# Altium PCB PCB1.PcbDoc
Units mm, origin at the board's own origin, x right, y up, seen from the top; angles counter-clockwise.
Board outline 130 x 70 mm, 2 copper layers (Top Layer, Bottom Layer); 76 components, 56 nets, 268 pads, 0 vias.
Unrouted connection lines stored in the file: 181.
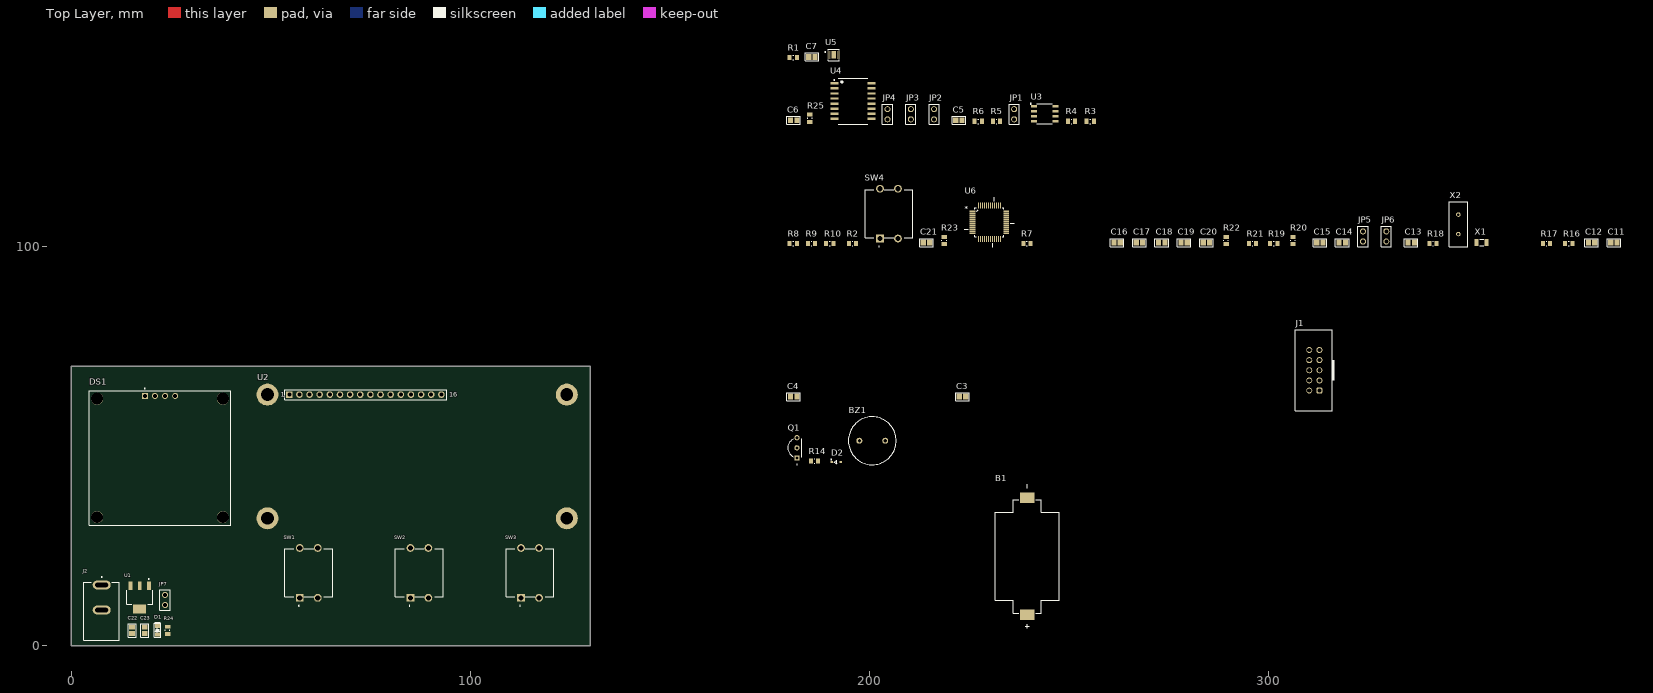
[diagram p0: Top Layer view]
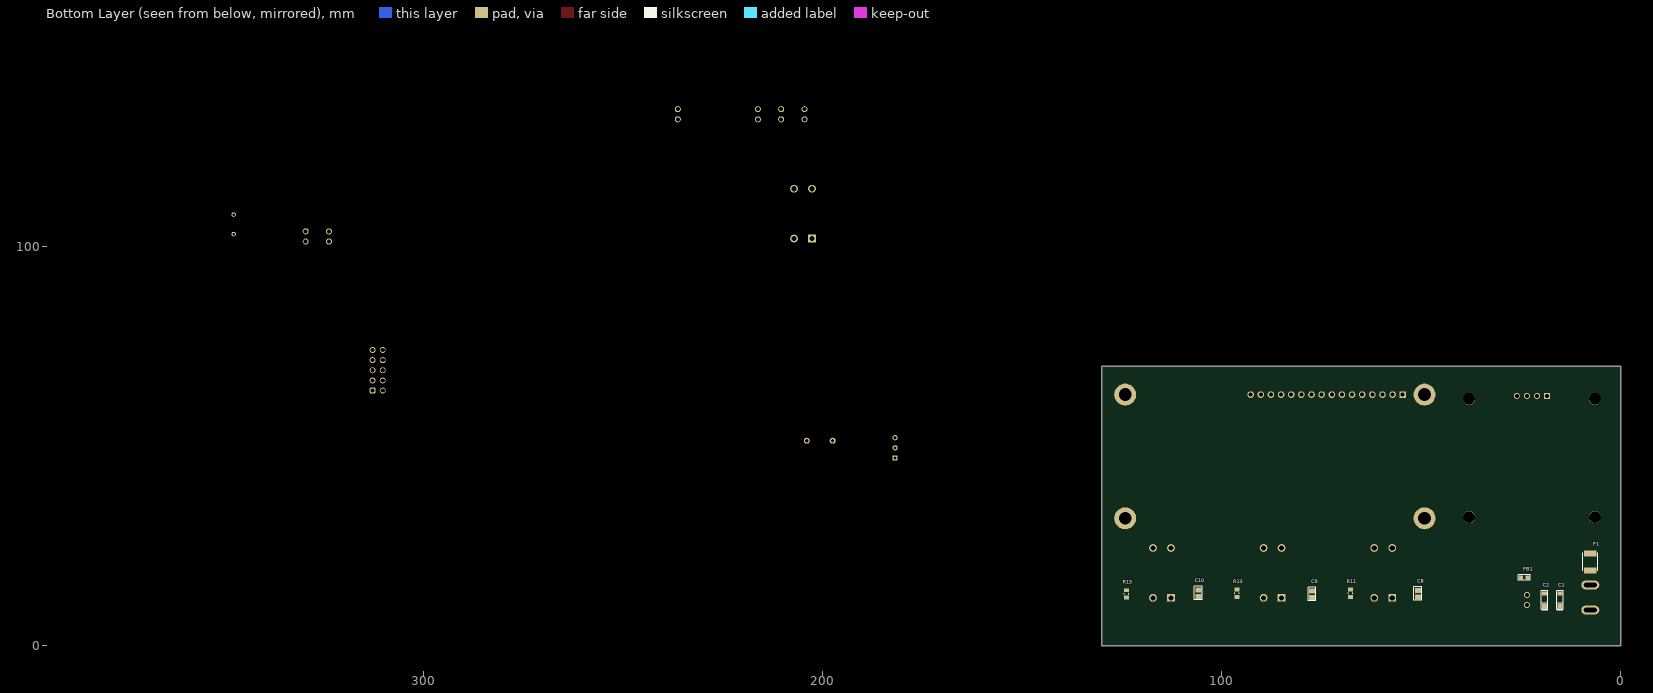
[diagram p1: Bottom Layer view, seen from below]

## Layer stack, top to bottom
Top Solder: solder mask 0.0102, Solder Resist, Dk 3.5
Top Layer: signal copper 0.0356
Dielectric 1: dielectric 0.32, FR-4, Dk 4.8
Bottom Layer: signal copper 0.0356
Bottom Solder: solder mask 0.0102, Solder Resist, Dk 3.5

## Board outline
0,0 0,70 130,70 130,0

## Design rules (kind name [scope] priority, off if disabled: settings)
Clearance [All] p1: gap=0.254 ignorepadtopadclearanceinfootprint=FALSE
PolygonConnect [All] p1: connectstyle=Relief reliefconductorwidth=0.254 reliefentries=4 polygonreliefangle="90 Angle" airgapwidth=0.254
RoutingVias [All] p1: holewidth=0.711 width=1.27 viastyle="Through Hole" minholewidth=0.711 minwidth=1.27 maxholewidth=0.711 maxwidth=1.27
SolderMaskExpansion [All] p1: expansion=0.102 istentingtop=FALSE
SupplyNets "Schematic Supply Nets_5" [InNet('GND')] p1: voltage=0.000
SupplyNets "Schematic Supply Nets_4" [InNet('+3V3')] p2: voltage=0.000
SupplyNets "Schematic Supply Nets_3" [InNet('VBAT')] p3: voltage=0.000
SupplyNets "Schematic Supply Nets_2" [InNet('+5V')] p4: voltage=0.000
SupplyNets "Schematic Supply Nets_1" [InNet('VDD_MCU')] p5: voltage=0.000
SupplyNets "Schematic Supply Nets" [InNet('VIN')] p6: voltage=0.000
Width [All] p1: maxlimit=0.254 minlimit=0.254 preferedwidth=0.254
30 further rules are at their usual default settings.

## Classes and differential pairs
component class SENSORS: C7 R1 U5
component class RTC: C5 C6 JP1 JP2 JP3 JP4 R3 R4 R5 R6 R25 U3 U4
component class POWER: C1 C2 C22 C23 D1 F1 FB1 J2 JP7 R24 U1
component class MCU: B1 C11 C12 C13 C14 C15 C16 C17 C18 C19 C20 C21 J1 JP5 JP6 R2 R7 R8 R9 R10 R16 R17 R18 R19 R20 R21 R22 R23 SW4 U6 X1 X2
component class DISPLAY: C3 C4 DS1 U2
component class BUZZERS: BZ1 D2 Q1 R14
component class BUTTONS: C8 C9 C10 R11 R13 R15 SW1 SW2 SW3

## Components (designator, comment, footprint, x,y, rotation, side; value= is the part's Value field where it differs from the comment)
B1 "0" BAT-HOLD-2032 239.522,22.352 r90 top
BZ1 "2700HZ/89dB" BUZZER_1209 200.66,51.308 r0 top
C1 "10uF/16V" CAP_Tantalum_3216 15.24,11.43 r90 bottom
C2 "10uF/16V" CAP_Tantalum_3216 19.05,11.43 r90 bottom
C3 "100nF/50v" CAP-CER-0805 223.266,62.357 r0 top
C4 "100nF/50v" CAP-CER-0805 180.975,62.357 r0 top
C5 "100nF/50v" CAP-CER-0805 222.377,131.572 r0 top
C6 "100nF/50v" CAP-CER-0805 180.975,131.572 r0 top
C7 "100nF/50v" CAP-CER-0805 185.547,147.447 r0 top
C8 "100nF/50v" CAP-CER-0805 50.8,12.992 r270 bottom
C9 "100nF/50v" CAP-CER-0805 77.343,12.865 r270 bottom
C10 "100nF/50v" CAP-CER-0805 105.791,13.119 r90 bottom
C11 "20pF/50V" CAP-CER-0805 386.461,100.965 r0 top
C12 "20pF/50V" CAP-CER-0805 380.873,100.965 r0 top
C13 "100nF/50v" CAP-CER-0805 335.661,100.965 r0 top
C14 "20pF/50V" CAP-CER-0805 318.389,100.965 r0 top
C15 "20pF/50V" CAP-CER-0805 312.801,100.965 r0 top
C16 "100nF/50v" CAP-CER-0805 262.001,100.965 r0 top
C17 "100nF/50v" CAP-CER-0805 267.589,100.965 r0 top
C18 "100nF/50v" CAP-CER-0805 273.177,100.965 r0 top
C19 "100nF/50v" CAP-CER-0805 278.765,100.965 r0 top
C20 "4.7uF/50v" CAP-CER-0805 284.353,100.965 r0 top
C21 "100nF/50v" CAP-CER-0805 214.249,100.965 r0 top
C22 "100nF/50v" CAP-CER-0805 15.24,3.81 r90 top
C23 "100nF/50v" CAP-CER-0805 18.415,3.81 r90 top
D1 "1.8V" LED_SMD_0805_GREEN 21.59,3.81 r90 top
D2 "0.15A/75V" SOD323 191.643,45.974 r0 top
DS1 "OLED_128X64_1.3_I2C" LCD_OLED_128X64_1.3_I2C 22.225,46.99 r0 top
F1 "24V/1.5A" FUSER_MF-MSMF150/24X-2 7.62,20.955 r270 bottom
FB1 "220R/100MHz" FERRITE-0603 24.13,17.018 r0 bottom
J1 "SBH11-PBPC-D05-ST-BK" IDC-10POS-2.54 311.404,68.961 r90 top
J2 "0" JACK_DC_PJ-037AH 7.62,15.19 r270 top
JP1 "JUMPER-2POS" JUMPER-2POS-2.54 236.22,131.826 r90 top
JP2 "JUMPER-2POS" JUMPER-2POS-2.54 216.154,131.826 r90 top
JP3 "JUMPER-2POS" JUMPER-2POS-2.54 210.312,131.826 r90 top
JP4 "JUMPER-2POS" JUMPER-2POS-2.54 204.47,131.826 r90 top
JP5 "JUMPER-2POS" JUMPER-2POS-2.54 323.596,101.219 r90 top
JP6 "JUMPER-2POS" JUMPER-2POS-2.54 329.438,101.219 r90 top
JP7 "JUMPER-2POS" JUMPER-2POS-2.54 23.495,10.16 r90 top
Q1 "2N2222" TO92254P470H750-3 179.451,49.53 r90 top
R1 "10KR" RES-SMD-0805 180.848,147.32 r0 top
R2 "10KR" RES-SMD-0805 195.707,100.711 r0 top
R3 "10KR" RES-SMD-0805 255.27,131.318 r0 top
R4 "10KR" RES-SMD-0805 250.571,131.318 r0 top
R5 "10KR" RES-SMD-0805 231.775,131.318 r0 top
R6 "10KR" RES-SMD-0805 227.203,131.318 r0 top
R7 "10KR" RES-SMD-0805 239.395,100.711 r0 top
R8 "10KR" RES-SMD-0805 180.848,100.711 r0 top
R9 "10KR" RES-SMD-0805 185.42,100.711 r0 top
R10 "10KR" RES-SMD-0805 189.992,100.711 r0 top
R11 "10KR" RES-SMD-0805 67.691,13.081 r270 bottom
R13 "10KR" RES-SMD-0805 96.139,13.081 r90 bottom
R14 "470R" RES-SMD-0805 186.182,46.228 r0 top
R15 "10KR" RES-SMD-0805 123.825,12.954 r270 bottom
R16 "10KR" RES-SMD-0805 375.158,100.711 r0 top
R17 "10KR" RES-SMD-0805 369.57,100.711 r0 top
R18 "1MR" RES-SMD-0805 341.122,100.711 r0 top
R19 "1KR" RES-SMD-0805 301.244,100.711 r0 top
R20 "1KR" RES-SMD-0805 306.07,101.473 r90 top
R21 "0KR" RES-SMD-0805 295.91,100.711 r0 top
R22 "0KR" RES-SMD-0805 289.306,101.473 r90 top
R23 "10KR" RES-SMD-0805 218.694,101.473 r90 top
R24 "1KR" RES-SMD-0805 24.13,3.81 r270 top
R25 "10KR" RES-SMD-0805 185.039,132.08 r90 top
SW1 "0" Tactice-Switch-TH-12x12-4.5mm 59.498,18.2 r90 top
SW2 "0" Tactice-Switch-TH-12x12-4.5mm 87.213,18.2 r90 top
SW3 "0" Tactice-Switch-TH-12x12-4.5mm 114.928,18.2 r90 top
SW4 "0" Tactice-Switch-TH-12x12-4.5mm 204.851,108.204 r90 top
U1 "LM1117IMP-3.3/NOPB" LM1117IMP-3.3/NOPB 17.145,12.065 r270 top
U2 "LCD1602" LCD16X2 46.61,65.405 r0 top
U3 "AT24C256C-SSHL-T" AT24C256C-SSHL-T 243.84,133.223 r0 top
U4 "DS3231SN#T&R" DS3231SN_SOIC127P1032X265-16N 195.834,136.398 r0 top
U5 "SHT31-DIS-B2.5KS" SHT31-DIS-B2.5KS_U_SHT3_SEN 191.008,147.955 r0 top
U6 "STM32F103C8T6" QFP50P900X900X160-48N 229.997,106.045 r0 top
X1 "32.768 kHz" XTAL_FC-135_32.7680KA-A0 353.314,100.965 r0 top
X2 "8MHz" HC49-S 347.472,105.537 r90 top

## Footprints (in the part's own frame and the unit in brackets; to place one, negate y for a bottom-side part, rotate by r counter-clockwise, add the part's x,y. Pads: shape width x height; smd on the part's side, far side on the other; paste and mask are expansions set on the pad)
AT24C256C-SSHL-T [mm]
  rect 1.55x0.6 smd: 1(-2.7,1.905) 2(-2.7,0.635) 3(-2.7,-0.635) 4(-2.7,-1.905) 5(2.7,-1.905) 6(2.7,-0.635) 7(2.7,0.635) 8(2.7,1.905)
  silkscreen extent -3.63,-2.45 1.95,2.63, body extent -3,-2.45 3,2.45, height 1.75
BAT-HOLD-2032 [mm]
  rect 2.59x3.61 smd: 1(-14.655,0) 2(14.655,0)
  silkscreen extent -18,-8 18,8, body extent -15.93,-8 15.9,8, height 5.71
BUZZER_1209 [mm]
  round 1.5 hole 0.762: 1(3.25,0) 2(-3.25,0)
  silkscreen extent -6,-6 6,6, body extent -6,-6.13 6,5.87, height 9.5
CAP-CER-0805 [mm] "Chip Capacitor, 2-Leads, Body 2.00x1.25mm, IPC Medium Density"
  rect 1.3x1.45 smd: 1(-0.8,0) 2(0.8,0)
  silkscreen extent -1.7,-1 1.7,1, body extent -1.1,-0.72 1.1,0.72, height 1.4
CAP_Tantalum_3216 [mm] "Capacitor, SM Tantalum; Body 3.2 x 1.6 mm (LxW typ)"
  rect 1.1x1.3 smd: 1(-1.6,0) 2(1.6,0)
  silkscreen extent -2.6,-0.8 2.3,0.8, body extent -1.8,-0.8 1.81,0.8, height 1.65
DS3231SN_SOIC127P1032X265-16N [mm]
  rrect25% 2.05x0.59 smd: 1(-4.655,4.445) 2(-4.655,3.175) 3(-4.655,1.905) 4(-4.655,0.635) 5(-4.655,-0.635) 6(-4.655,-1.905) 7(-4.655,-3.175) 8(-4.655,-4.445) 9(4.655,-4.445) 10(4.655,-3.175) 11(4.655,-1.905) 12(4.655,-0.635) 13(4.655,0.635) 14(4.655,1.905) 15(4.655,3.175) 16(4.655,4.445)
  silkscreen extent -4.8,-5.77 3.75,5.77, body extent -5.16,-5.15 5.16,5.15, height 2.65
FERRITE-0603 [mm] "Chip Inductor, 2-Leads, Body 1.60x0.80mm, IPC Medium Density"
  rect 1x0.96 smd: 1(-0.8,0) 2(0.8,0)
  silkscreen extent -1.52,-0.71 1.52,0.71, body extent -0.87,-0.48 0.87,0.48, height 0.95
FUSER_MF-MSMF150/24X-2 [mm]
  rect 1.5x3.2 smd: 1(-2.1,0) 2(2.1,0)
  silkscreen extent -2.27,-1.91 2.27,1.91, body extent -2.27,-1.62 2.27,1.62, height 0.85
HC49-S [mm]
  round 1.13 hole 0.63: 1(-2.44,0) 2(2.44,0)
  silkscreen extent -5.68,-2.32 5.68,2.32, body extent -5.68,-2.32 5.68,2.32, height 3.64
IDC-10POS-2.54 [mm]
  rrect50% 1.5x1.5 hole 1.02: 1(-5.08,-1.27)
  round 1.5 hole 1.02: 2(-5.08,1.27) 3(-2.54,-1.27) 4(-2.54,1.27) 5(0,-1.27) 6(0,1.27) 7(2.54,-1.27) 8(2.54,1.27) 9(5.08,-1.27) 10(5.08,1.27)
  silkscreen extent -10.16,-5.08 10.16,4.83, body extent -10.18,-4.43 10.18,4.75, height 8.87
JACK_DC_PJ-037AH [mm]
  oval 2.25x4.5 hole 1.1 slot 3.2 at 90 deg: 1(0,0) 2(6.3,0)
  silkscreen extent -2.1,-4.45 13.8,4.45, body extent -0.78,-4.45 13.72,4.45, height 12.02
JUMPER-2POS-2.54 [mm]
  round 1.5 hole 1.02: 1(0,0) 2(2.54,0)
  silkscreen extent -1.27,-1.27 3.81,1.27, body extent -1.27,-1.27 3.81,1.27, height 8.54
LCD16X2 [mm] "LCD 16x2"
  rect 1.65x1.65 hole 1: 1(8,-2.54)
  round 1.65 hole 1: 2(10.54,-2.54) 3(13.08,-2.54) 4(15.62,-2.54) 5(18.16,-2.54) 6(20.7,-2.54) 7(23.24,-2.54) 8(25.78,-2.54) 9(28.32,-2.54) 10(30.86,-2.54) 11(33.4,-2.54) 12(35.94,-2.54) 13(38.48,-2.54) 14(41.02,-2.54) 15(43.56,-2.54) 16(46.1,-2.54)
  round 5.5 hole 3.2: ""(2.54,-33.54) ""(77.54,-33.54)
  round 5.5 hole 3.2 paste-2539.97: ""(2.54,-2.54) ""(77.54,-2.54)
  silkscreen extent 6.86,-3.81 47.5,-1.27, body extent 0,-36 80,0, height 17
LCD_OLED_128X64_1.3_I2C [mm]
  rect 1.508x1.508 / inner round 1.508 / far side rect 1.508x1.508 hole 1: 1(-3.81,15.55)
  round 1.508 hole 1: 2(-1.27,15.55) 3(1.27,15.55) 4(3.81,15.55)
  round 3 hole 3 unplated: ""(-15.75,-14.85) ""(-15.75,14.85) ""(15.75,-14.85) ""(15.75,14.85)
  silkscreen extent -17.75,-16.85 17.75,17.5
LED_SMD_0805_GREEN [mm] "Chip Resistor, Body 2.0x1.3mm, IPC High Density"
  rect 1x1.3 smd: 1(-1.1,0) 2(1.1,0)
  silkscreen extent -1.75,-0.8 2.05,0.8, body extent -1.2,-0.75 1.2,0.75, height 0.9
LM1117IMP-3.3/NOPB [mm]
  rect 2.15x0.95 smd: 1(-2.9,2.3) 2(-2.9,0) 3(-2.9,-2.3)
  rect 2.15x3.25 smd: "2 "(2.9,0)
  silkscreen extent -4.7,-3.25 1.75,3.25, body extent -3.5,-3.25 3.5,3.25, height 1.8
QFP50P900X900X160-48N [mil]
  rect 58x11 smd: 1(-166,108) 2(-166,89) 3(-166,69) 4(-166,49) 5(-166,30) 6(-166,10) 7(-166,-10) 8(-166,-30) 9(-166,-49) 10(-166,-69) 11(-166,-89) 12(-166,-108) 25(166,-108) 26(166,-89) 27(166,-69) 28(166,-49) 29(166,-30) 30(166,-10) 31(166,10) 32(166,30) 33(166,49) 34(166,69) 35(166,89) 36(166,108)
  rect 11x58 smd: 13(-108,-166) 14(-89,-166) 15(-69,-166) 16(-49,-166) 17(-30,-166) 18(-10,-166) 19(10,-166) 20(30,-166) 21(49,-166) 22(69,-166) 23(89,-166) 24(108,-166) 37(108,166) 38(89,166) 39(69,166) 40(49,166) 41(30,166) 42(10,166) 43(-10,166) 44(-30,166) 45(-49,166) 46(-69,166) 47(-89,166) 48(-108,166)
  silkscreen extent -247,-245 247,248, body extent -177,-177 177,177, height 63
RES-SMD-0805 [mm] "Chip Resistor, 2-Leads, Body 2,00x1,25mm, IPC Medium Density"
  rect 1x1.35 smd: 1(-0.9,0) 2(0.9,0)
  silkscreen extent -0.1,-0.58 0.1,0.58, body extent -1.05,-0.67 1.05,0.67, height 0.6
SHT31-DIS-B2.5KS_U_SHT3_SEN [mil]
  rect 30x10 smd paste+0 mask+0: 1(-48,29.53) 2(-48,9.85) 3(-48,-9.85) 4(-48,-29.53) 5(48,-29.53) 6(48,-9.85) 7(48,9.85) 8(48,29.53)
  rect 47x75 smd paste+0 mask+0: 9(0,0)
  silkscreen extent -89,-56 56,56, body extent -51,-51 51,51, height 39
SOD323 [mm]
  rect 0.6x0.6 smd: A(1.1,0) C(-1.1,0)
  silkscreen extent -1.4,-0.4 0.1,0.76, body extent -1.25,-0.63 1.25,0.63, height 1
Tactice-Switch-TH-12x12-4.5mm [mm]
  rect 1.95x1.95 / inner round 1.95 / far side rect 1.95x1.95 hole 1.3: 1(-6.25,2.25)
  round 1.95 hole 1.3: 2(6.25,2.25) 3(-6.25,-2.25) 4(6.25,-2.25)
  silkscreen extent -8.32,-6 6,6, body extent -7,-6 7,6, height 11.7
TO92254P470H750-3 [mm]
  rect 1.298x1.298 / inner round 1.298 / far side rect 1.298x1.298 hole 0.79: 1(-2.54,-2.33)
  round 1.298 hole 0.79: 2(0,-2.33) 3(2.54,-2.33)
  silkscreen extent -4.29,-3.6 2.3,0, body extent -2.74,-3.85 2.74,-0.25, height 8.09
XTAL_FC-135_32.7680KA-A0 [mm]
  rect 1x1.8 smd: 1(-1.25,0) 2(1.25,0)
  silkscreen extent -0.5,-0.8 0.5,0.8, body extent -1.6,-0.75 1.6,0.75, height 0.9

## Part data
B1: library part ID-20, Design Item ID=ID-20
BZ1: library part BUZZER
C1 C2: library part ID-25, "Tụ Tantalum 10uF 16V 1206 TAJA106K016RNJ", Design Item ID=ID-25
C3 C4 C5 C6 C7 C22 C23: library part CAP-CER
C8 C9 C10 C13 C16 C17 C18 C19 C21: library part ID-14, "Tụ Gốm 0805 100nF (0.1uF) 50V", Design Item ID=ID-14
C11 C12 C14 C15: library part ID-11, "0805 20pF 50V", Design Item ID=ID-11
C20: library part ID-15, "Tụ Gốm 0805 4.7uF 50V", Design Item ID=ID-15
D1: library part ID-26, "LED Xanh Lá 0805 Dán SMD Trong Suốt Harvatek", Mfr# #=Green, Design Item ID=ID-26
D2: library part ID-32, "1N4148W Diode Chỉnh Lưu 0.15A 75V SOD323", Package="SOD-323F Diotec", Check_prices=https://www.snapeda.com/parts/1N4148WS/Diotec/view-part/?ref=eda, Design Item ID=ID-32, MF="Diotec Semiconductor", MP=1N4148WS, SnapEDA_Link=https://www.snapeda.com/parts/1N4148WS/Diotec/view-part/?ref=snap
DS1: library part ID-5, Package=None, Check_prices=https://www.snapeda.com/parts/OLED%20128x64%201.3%22%20I2C/UNIVERSAL-SOLDER+Electronics+Ltd/view-part/?ref=eda, Design Item ID=ID-5, MF="UNIVERSAL-SOLDER Electronics Ltd", Mfr# #=OLED_128X64_1.3_I2C, MP="OLED 128x64 1.3&quot; I2C", SnapEDA_Link=https://www.snapeda.com/parts/OLED%20128x64%201.3%22%20I2C/UNIVERSAL-SOLDER+Electronics+Ltd/view-part/?ref=snap
F1: library part ID-29, "MF-MSMF150/24X-2 Cầu Chì Tự Phục Hồi 1812 24V 1.5A", Design Item ID=ID-29
FB1: library part ID-27, Design Item ID=ID-27
J1: library part ID-16, Design Item ID=ID-16, Mfr# #=SBH11-PBPC-D05-ST-BK
J2: library part "JACK DC", "2.0 x 6.5 mm, 5.0 A, Horizontal, Through Hole, Dc Power Jack Connector", Package=None, Check_prices=https://www.snapeda.com/parts/PJ-037AH/Same+Sky/view-part/?ref=eda, MF="Same Sky", MP=PJ-037AH, SnapEDA_Link=https://www.snapeda.com/parts/PJ-037AH/Same+Sky/view-part/?ref=snap
JP1 JP2 JP3 JP4 JP5 JP6 JP7: library part ID-7, Design Item ID=ID-7, Mfr# #=JUMPER-2POS
Q1: library part ID-30, "P2N2222A Transistor NPN 40V 0.6A 3 Chân TO-92", Design Item ID=ID-30
R1 R2 R7 R8 R9 R10 R11 R13 R15 R16 R17 R23: library part ID-4, "Điện Trở 10 KOhm 0805 1%", Design Item ID=ID-4
R3 R4 R5 R6 R24 R25: library part RES_SMD
R14: library part ID-31, "Điện Trở 470 Ohm 0805 1%", Design Item ID=ID-31
R18: library part ID-12, "Điện Trở 1 MOhm 0805 1%", Design Item ID=ID-12
R19 R20: library part ID-19, "Điện Trở 1 KOhm 0805 1%", Design Item ID=ID-19
R21 R22: library part ID-21, "Điện Trở 0 Ohm 0805 1%", Design Item ID=ID-21
SW1 SW2 SW3 SW4: library part ID-18, "Nút Nhấn 6x6mm Cao 6mm 4 Chân Xuyên Lỗ", Design Item ID=ID-18
U1: library part LDO, "800-mA 15-V linear voltage regulator", Package="SOT-223-4 Texas Instruments", Check_prices=https://www.snapeda.com/parts/LM1117IMP-3.3/NOPB/Texas+Instruments/view-part/?ref=eda, MF="Texas Instruments", MP=LM1117IMP-3.3/NOPB, SnapEDA_Link=https://www.snapeda.com/parts/LM1117IMP-3.3/NOPB/Texas+Instruments/view-part/?ref=snap
U3: library part ID-9, "EEPROM Memory IC 256Kbit I2C 1 MHz 550 ns 8-SOIC", Design Item ID=ID-9, Mfr# #=AT24C256C-SSHL-T
U4: library part ID-8, "Real Time Clock (RTC) IC Clock/Calendar I2C, 2-Wire Serial 16-SOIC (0.295\", 7.50mm Width)", Design Item ID=ID-8, Mfr# #=DS3231SN#T&R
U5: library part ID-3, "Humidity, Temperature 0 ~ 100% RH I2C ±2% RH 8 s Surface Mount", Manufacturer_Name=Sensirion, Copyright="Copyright (C) 2025 Ultra Librarian. All rights reserved.", Design Item ID=ID-3, Manufacturer_Part_Number=SHT31-DIS-B2.5KS, Mfr# #=SHT31-DIS-B2.5KS, RefDes=RefDes, Type=Type
U6: "ARM® Cortex®-M3 STM32F1 Microcontroller IC 32-Bit 72MHz 64KB (64K x 8) FLASH 48-LQFP (7x7)", Package="LQFP-48 STMicroelectronics", Check_prices=https://www.snapeda.com/parts/STM32F103C8T6/STMicroelectronics/view-part/?ref=eda, MF=STMicroelectronics, MP=STM32F103C8T6, SnapEDA_Link=https://www.snapeda.com/parts/STM32F103C8T6/STMicroelectronics/view-part/?ref=snap
X1: library part ID-13, "Thạch Anh FC-135 32.768KHz 3215", Mfr# #=FC-135, Design Item ID=ID-13
X2: library part ID-10, "8 MHz ±30ppm Crystal 18pF 100 Ohms HC-49/US", Mfr# #=HC49-S, Design Item ID=ID-10

## Nets (pads, with @x,y where several pads share a name; then routed paths per layer and width w, separated by ;. In a path a pad name is that pad's centre, name@x,y a point inside that pad or via, vN(x,y) a via of type N, cw(c..) or ccw(c..) an arc to the next point about the centre after c; other vN are vias at no path point)
+3V3: C2.1 C4.2 C5.2 C6.2 C7.2 C23.2 D1.1 DS1.1 JP7.1 R1.2 R3.2 R4.2 R5.2 R6.2 R25.2 U1.2 U3.8 U4.2 U5.5
+5V: F1.2 J2.1
BOOT0: JP5.1 R19.2 U6.44
BOOT1: JP6.1 R20.2 U6.20
GND: B1.2 C1.2 C2.2 C3.1 C4.1 C5.1 C6.1 C7.1 C8.1 C9.1 C10.1 C11.1 C13.1 C15.1 C16.1 C17.1 C18.1 C19.1 C20.1 C21.2 C22.1 C23.1 DS1.2 J1.3 J1.5 J1.7 J1.8 J1.9 J2.2 Q1.1 R11.1 R13.1 R15.1 R19.1 R20.1 R23.1 R24.2 U1.1 U2.1 U2.15 U2.16 U3.4 U4.13 U5.2 U5.7 U5.8 U5.9 U6.8 U6.23 U6.35 U6.47
NetB1_1: B1.1 R22.1
NetBZ1_2: BZ1.2 D2.A Q1.2
NetC8_2: C8.2 SW1.1 SW1.2 U6.39
NetC9_2: C9.2 SW2.1 SW2.2 U6.40
NetC10_2: C10.2 SW3.1 SW3.2 U6.41
NetC12_1: C12.1 C14.1
NetC21_1: C21.1 R7.1 SW4.3 SW4.4 U6.7
NetD1_2: D1.2 R24.1
NetDS1_3: DS1.3 R9.1 U5.4 U6.21
NetDS1_4: DS1.4 R8.1 U5.1 U6.22
NetFB1_1: FB1.1 JP7.2
NetJP1_1: JP1.1 R3.1
NetJP1_2: JP1.2 U3.7
NetJP2_1: JP2.1 R4.1
NetJP2_2: JP2.2 U3.1
NetJP3_1: JP3.1 R5.1
NetJP3_2: JP3.2 U3.2
NetJP4_1: JP4.1 R6.1
NetJP4_2: JP4.2 U3.3
NetJP5_2: JP5.2 R17.1
NetJP6_2: JP6.2 R16.1
NetQ1_3: Q1.3 R14.2
NetR2_1: R2.1 U3.6 U4.16 U6.45
NetR10_1: R10.1 U3.5 U4.15 U6.46
NetR11_2: R11.2 SW1.3 SW1.4
NetR13_2: R13.2 SW2.3 SW2.4
NetR14_1: R14.1 U6.18
NetR15_2: R15.2 SW3.3 SW3.4
NetR23_2: R23.2 SW4.1 SW4.2
NetR25_1: R25.1 U4.3 U6.19
NetU2_4: U2.4 U6.31
NetU2_5: U2.5 U6.32
NetU2_6: U2.6 U6.33
NetU2_7: U2.7 U6.12
NetU2_8: U2.8 U6.13
NetU2_9: U2.9 U6.14
NetU2_10: U2.10 U6.15
NetU2_11: U2.11 U6.16
NetU2_12: U2.12 U6.17
NetU2_13: U2.13 U6.29
NetU2_14: U2.14 U6.30
OSC32_IN: C11.2 U6.3 X1.2
OSC32_OUT: C15.2 U6.4 X1.1
OSC_IN: C12.2 R18.2 U6.6 X2.2
OSC_OUT: C14.2 R18.1 U6.5 X2.1
RESET: R1.1 U5.6
SWCLK: J1.4 U6.37
SWDIO: J1.6 U6.34
VBAT: R21.1 R22.2 U4.14
VDD_MCU: C13.2 C16.2 C17.2 C18.2 C19.2 C20.2 FB1.2 J1.1 J1.2 R2.2 R7.2 R8.2 R9.2 R10.2 R16.2 R17.2 R21.2 U6.1 U6.9 U6.24 U6.36 U6.48
VIN: BZ1.1 C1.1 C3.2 C22.2 D2.C F1.1 U1.3 U2.2 U2.3
pads on no net: "U1.2 " DS1. J1.10 U2. U4.1 U4.4 U4.5 U4.6 U4.7 U4.8 U4.9 U4.10 U4.11 U4.12 U5.3 U6.2 U6.10 U6.11 U6.25 U6.26 U6.27 U6.28 U6.38 U6.42 U6.43

## Text inside footprints (layer, text, board x,y; h text height)
U2: Top Overlay "16" at 94.71,62.305 h1.2; Top Overlay "1" at 52.51,62.305 h1.2
U6: Top Overlay "*" at 223.818,108.791 h1.27; Top Overlay "*" at 223.823,108.789 h1.27; Mechanical 13 "*" at 223.819,108.791 h1.27; Mechanical 13 "*" at 223.816,108.792 h1.27